# Altium PCB USB.PcbDoc
Units mm, origin at the board's own origin, x right, y up, seen from the top; angles counter-clockwise.
Board outline 51.5 x 20 mm, 4 copper layers (Top Layer, Layer 1, Layer 2, Bottom Layer), stack 0.603 mm thick; 65 components, 42 nets, 210 pads, 98 vias.
Unrouted connection lines stored in the file: 27.
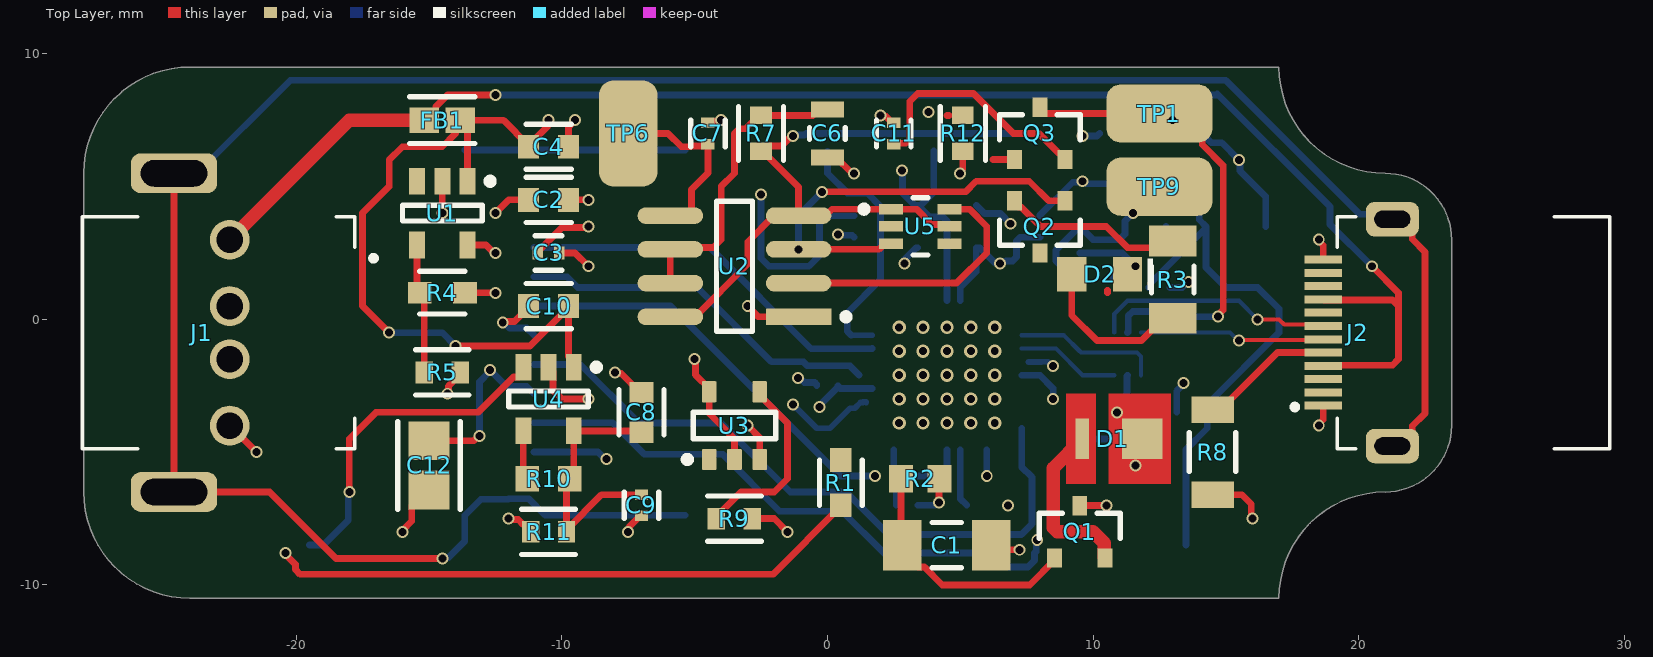
[diagram p0: Top Layer view]
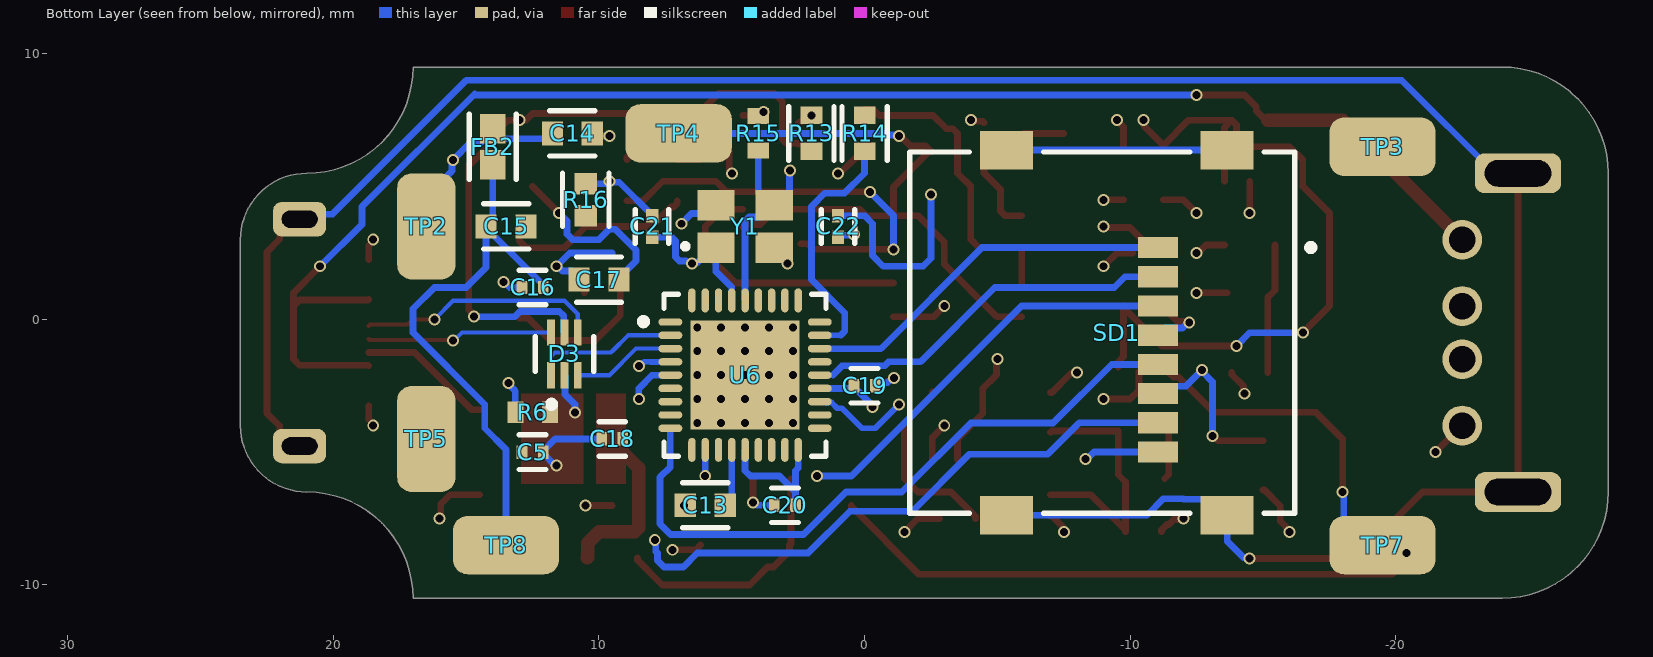
[diagram p1: Bottom Layer view, seen from below]
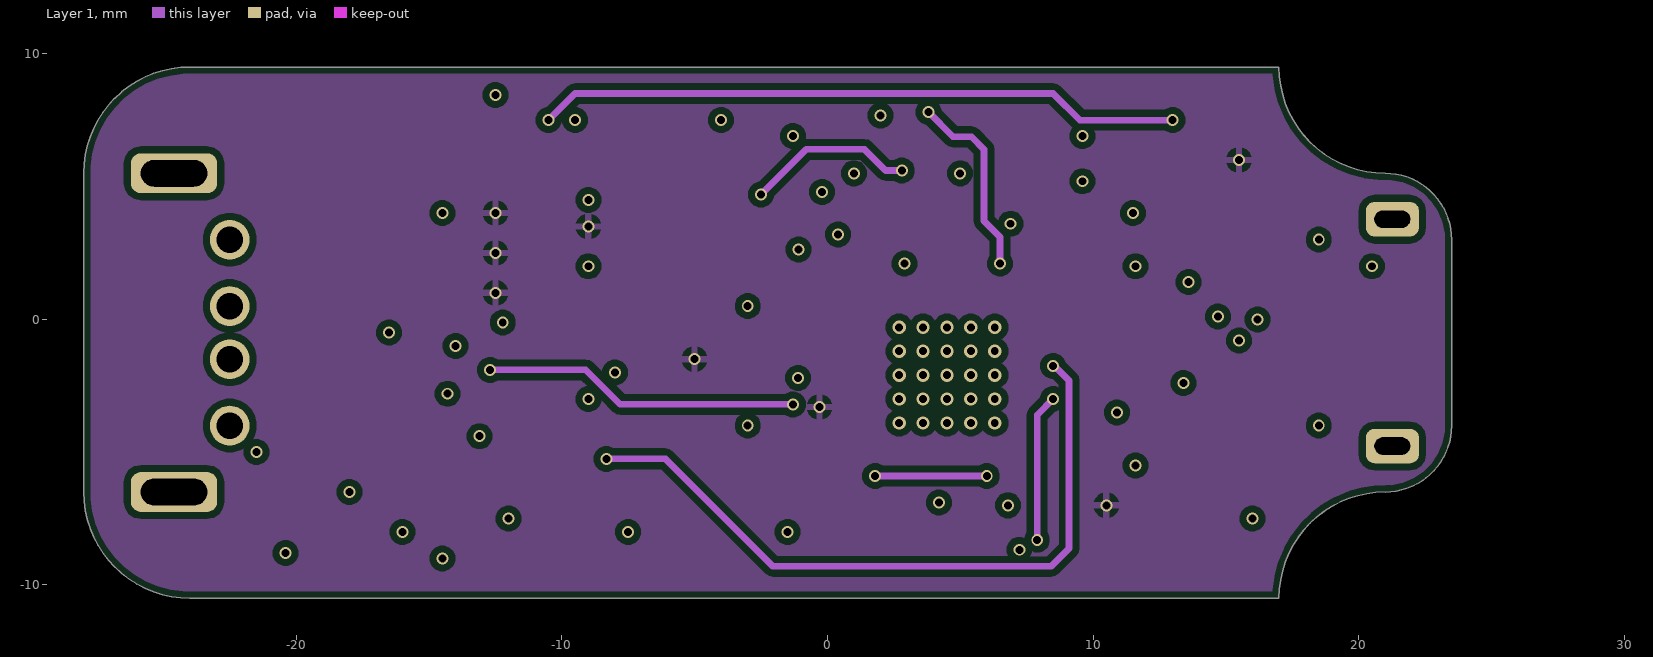
[diagram p2: Layer 1]
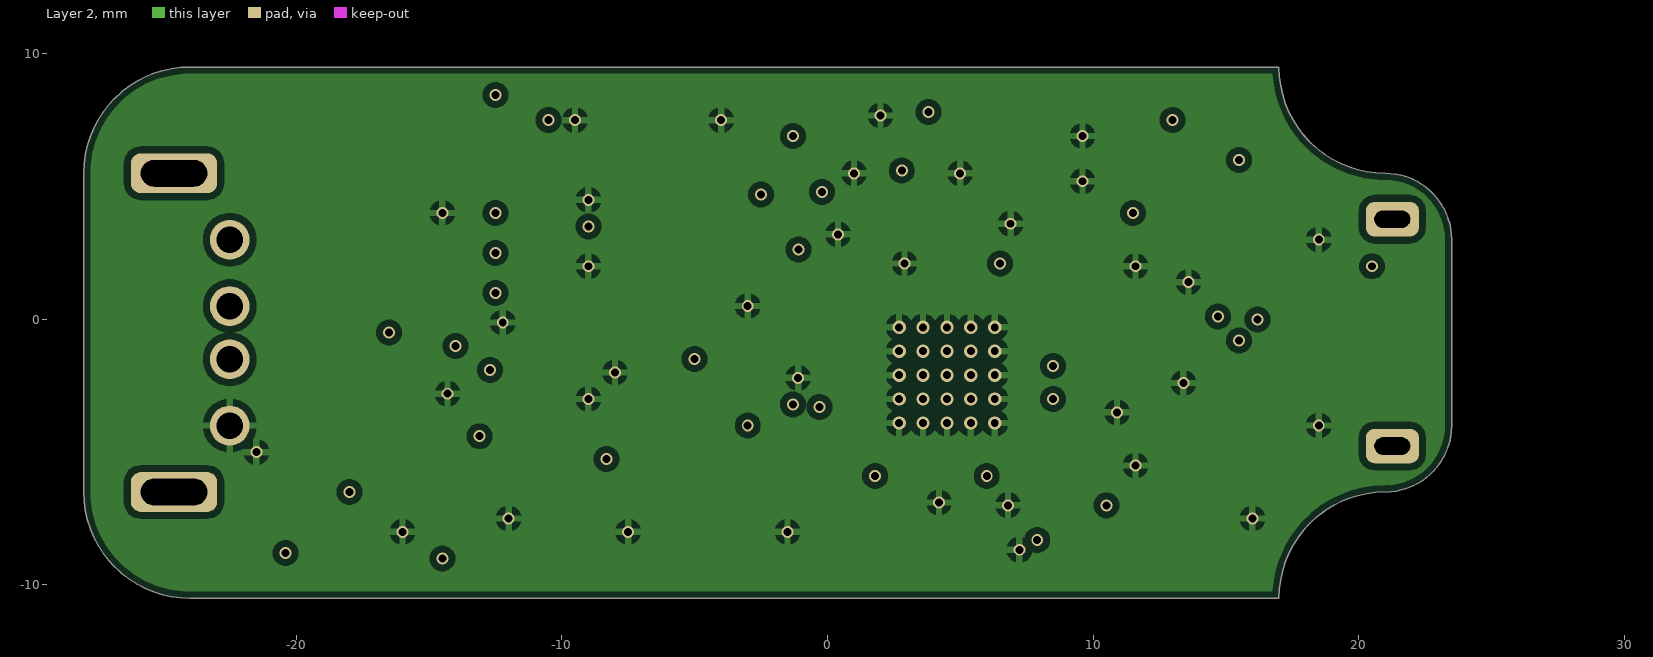
[diagram p3: Layer 2]
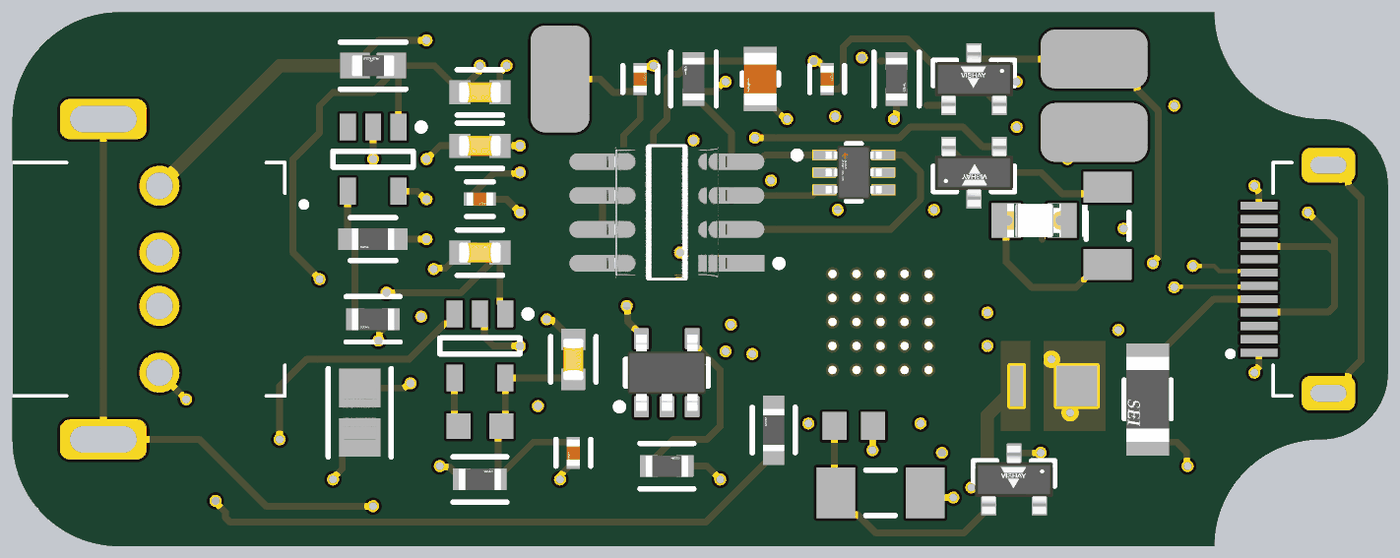
[diagram p4: 3D render of the assembled board from above, using the file's embedded part models]
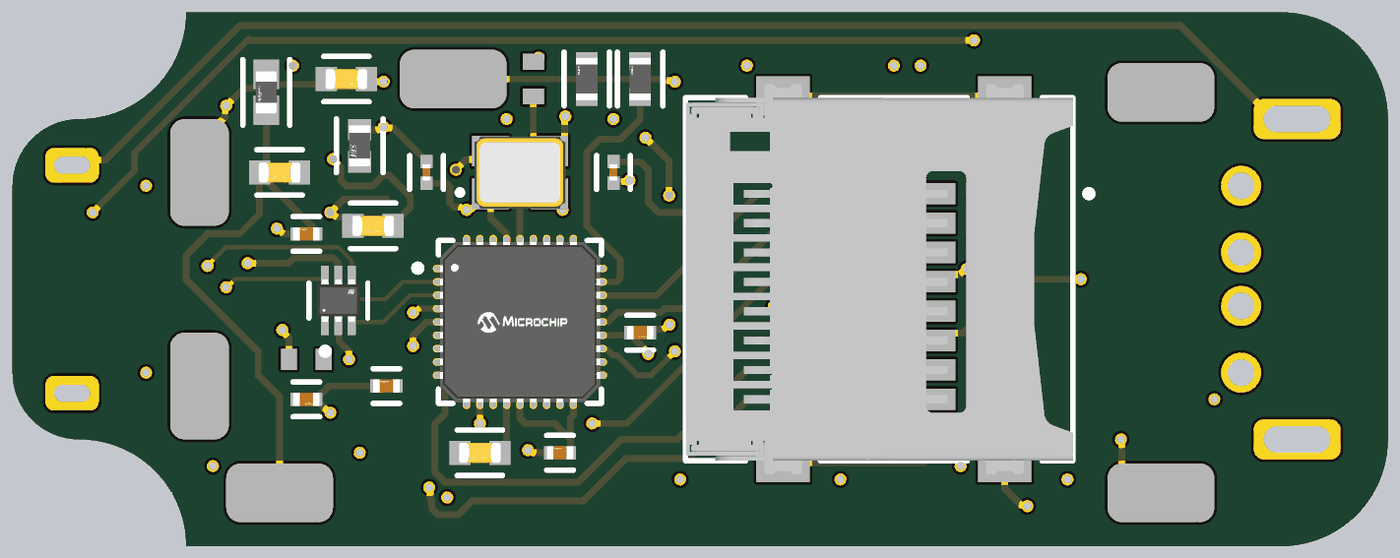
[diagram p5: 3D render of the assembled board from below, using the file's embedded part models]

## Layer stack, top to bottom
Top Solder: solder mask 0.0102, Solder Resist, Dk 3.5
Top Layer: signal copper 0.0356
Dielectric 2: prepreg 0.0711, PP-006, Dk 4.1
Layer 1: signal copper 0.035
Dielectric 1: dielectric 0.32, FR-4, Dk 4.8
Layer 2: signal copper 0.035
Dielectric 3: prepreg 0.0711, PP-006, Dk 4.1
Bottom Layer: signal copper 0.0356
Bottom Solder: solder mask 0.0102, Solder Resist, Dk 3.5

## Board outline
-24,-10.5 cw(c-24,-6.5) -28,-6.5 -28,5.5 cw(c-24,5.5) -24,9.5 17,9.5 ccw(c21,9.5) 21,5.5 cw(c21,3) 23.5,3 23.5,-4 cw(c21,-4) 21,-6.5 ccw(c21,-10.5) 17,-10.5

## Design rules (kind name [scope] priority, off if disabled: settings)
BoardOutlineClearance [All] p1: gap=0.254 ignorepadtopadclearanceinfootprint=FALSE except(0: Arc-SplitContinuation Track-SplitContinuation SMDPad-SplitContinuation THPad-SplitContinuation Via-SplitContinuation Fill-SplitContinuation Poly-SplitContinuation Region-SplitContinuation Text-SplitContinuation)
Clearance [All] p1: gap=0.254 ignorepadtopadclearanceinfootprint=FALSE except(0.15: Arc-SMDPad Track-SMDPad; 0.2: Arc-Arc Arc-Track Arc-Via Arc-Hole Track-Track Track-Via Track-Hole SMDPad-SMDPad; 0.3: Via-Via; 0.38: Arc-THPad Track-THPad)
DiffPairsRouting [All] p1: maxlimit=0.254 minlimit=0.17 mostfreqgap=0.254 toplayer_maxgap=0.23 toplayer_prefgap=0.2 toplayer_minwidth=0.13 toplayer_maxwidth=0.18 toplayer_prefwidth=0.155 midlayer1_mingap=0.254 midlayer1_minwidth=0.381 midlayer1_maxwidth=0.381 midlayer1_prefwidth=0.381 midlayer2_mingap=0.254 midlayer2_minwidth=0.381 midlayer2_maxwidth=0.381 midlayer2_prefwidth=0.381 bottomlayer_maxgap=0.23 bottomlayer_prefgap=0.2 bottomlayer_minwidth=0.13 bottomlayer_maxwidth=0.18 bottomlayer_prefwidth=0.155 maxuncoupledlength=12.7
PolygonConnect [All] p1: connectstyle=Relief reliefconductorwidth=0.254 reliefentries=4 polygonreliefangle="90 Angle" airgapwidth=0.254
RoutingVias [All] p1: holewidth=0.3 width=0.45 viastyle="Through Hole" minholewidth=0.3 minwidth=0.45 maxholewidth=0.3 maxwidth=0.45
SolderMaskExpansion [All] p1: expansion=0.102 istentingtop=FALSE
SupplyNets "Schematic Supply Nets_5" [InNet('VCC')] p1: voltage=0.000
SupplyNets "Schematic Supply Nets_4" [InNet('AVCC')] p2: voltage=0.000
SupplyNets "Schematic Supply Nets_3" [InNet('GND')] p3: voltage=0.000
SupplyNets "Schematic Supply Nets_2" [InNet('3V3')] p4: voltage=0.000
SupplyNets "Schematic Supply Nets" [InNet('4.5V')] p5: voltage=0.000
Width [All] p1: maxlimit=10 minlimit=0.2 preferedwidth=0.254 minimp=50.000000 maximp=50.000000 favimp=50.000000
29 further rules are at their usual default settings.

## Classes and differential pairs
component class U_MSC: C13 C14 C15 C16 C17 C18 C19 C20 C21 C22 FB2 R15 R16 TP8 TP9 U6 Y1
component class Master: C2 C3 C4 C5 C6 C7 C8 C9 C10 C11 C12 D3 FB1 J1 J2 Q3 R4 R5 R6 R7 R8 R9 R10 R11 R12 R13 R14 SD1 TP1 TP2 TP3 TP4 TP5 TP6 TP7 U1 U2 U3 U4 U5
component class Designator: C1 D1 D2 Q1 Q2 R1 R2 R3
differential pair D: +D_P -D_N
differential pair D_IN: +D_IN_P -D_IN_N

## Components (designator, comment, footprint, x,y, rotation, side; value= is the part's Value field where it differs from the comment)
C1 "GRM31CR60J107KEA8L" CAPC3216X19N 4.5,-8.5 r180 top value=100uF
C2 "CC0603KRX7R7BB105" FP-CC0603-DA-MFG -10.5,4.5 r0 top value="1 uF"
C3 "GRM155R71C104KA88J" FP-GRM155-0_05-MFG -10.5,2.5 r0 top
C4 "CC0603KRX7R7BB105" FP-CC0603-DA-MFG -10.5,6.5 r0 top value="1 uF"
C5 "GRM155R71C104KA88J" FP-GRM155-0_05-MFG 12.5,-5 r180 bottom
C6 "GRM21BR61C106KE15K" FP-GRM21B-0_1-MFG 0,7 r270 top
C7 "GRM155R71C104KA88J" FP-GRM155-0_05-MFG -4.5,7 r90 top
C8 "CC0603KRX7R7BB105" FP-CC0603-DA-MFG -7,-3.5 r90 top value="1 uF"
C9 "GRM155R71C104KA88J" FP-GRM155-0_05-MFG -7,-7 r270 top
C10 "CC0603KRX7R7BB105" FP-CC0603-DA-MFG -10.5,0.5 r180 top value="1 uF"
C11 "GRM155R71C104KA88J" FP-GRM155-0_05-MFG 2.5,7 r90 top
C12 "CL21A475KAQNNNE" FP-CL21-IPC_A -15,-5.5 r270 top
C13 "CC0603KRX7R7BB105" FP-CC0603-DA-MFG 6,-7 r180 bottom value="1 uF"
C14 "CC0603KRX7R7BB105" FP-CC0603-DA-MFG 11,7 r180 bottom value="1 uF"
C15 "CC0603KRX7R7BB105" FP-CC0603-DA-MFG 13.5,3.5 r180 bottom value="1 uF"
C16 "GRM155R71C104KA88J" FP-GRM155-0_05-MFG 12.5,1.2 r0 bottom
C17 "CC0603KRX7R7BB105" FP-CC0603-DA-MFG 10,1.5 r180 bottom value="1 uF"
C18 "GRM155R71C104KA88J" FP-GRM155-0_05-MFG 9.5,-4.5 r0 bottom
C19 "GRM155R71C104KA88J" FP-GRM155-0_05-MFG 0,-2.5 r180 bottom
C20 "GRM155R71C104KA88J" FP-GRM155-0_05-MFG 3,-7 r0 bottom
C21 "GJM0335C1E200FB01D" FP-GJM033-0_03-IPC_A 8,3.5 r90 bottom value=20pF
C22 "GJM0335C1E200FB01D" FP-GJM033-0_03-IPC_A 1,3.5 r270 bottom value=20pF
D1 "HL-AM-2835H489W-S1-08HL-HR3" HL-AM-2835H489W-S1-08HL-HR3-Footprint-1 10.6,-4.5 r0 top
D2 "150080RS75000" WL-SMCW_0805_150080xx75000 10.25,1.7 r180 top
D3 "USBLC6-2P6" FP-SOT-666-MFG 11.3,-1.3 r90 bottom
FB1 "BLM18PG600SN1D" FP-BLM18-0_15-t0_8-IPC_B -14.5,7.5 r180 top
FB2 "BLM18PG600SN1D" FP-BLM18-0_15-t0_8-IPC_B 14,6.5 r270 bottom
J1 "USB-AP-S-RA" BELFUSE_SS-52400-002#1 -24.6,-0.5 r270 top
J2 "GT-USB-8016B" BELFUSE_SS-52400-002#2 26,-0.5 r90 top
Q1 "SI2342DS-T1-GE3" FP-S-03946-MFG#1 9.5,-8 r90 top
Q2 "SI2342DS-T1-GE3" FP-S-03946-MFG#2 8,3.485 r270 top
Q3 "SI2342DS-T1-GE3" FP-S-03946-MFG#2 8,7 r90 top
R1 "RT0603BRD0732KL" FP-RT0603-0_55-MFG 0.5,-6.15 r90 top
R2 "2k" RESC1608X55X30ML15T15 3.5,-6 r180 top
R3 "62R 1% 1206(3216)" RESC1206(3216)_N 13,1.5 r270 top value=62.00
R4 "RT0603BRD0732KL" FP-RT0603-0_55-MFG -14.5,1 r180 top
R5 "RC0603FR-0710KL" FP-RC0603-0_55-IPC_C -14.5,-2 r180 top
R6 "RC0603JR-07330RL" RESC1608X55X25LL10T15 12.5,-3.5 r180 bottom
R7 "RC0603FR-0710KL" FP-RC0603-0_55-IPC_C -2.5,7 r90 top
R8 "RMCF1206JT56K0" FP-RMCF1206-MFG 14.5,-5 r270 top
R9 "RC0603FR-0710KL" FP-RC0603-0_55-IPC_C -3.5,-7.5 r0 top
R10 "RC0603FR-0744K2L" CAPC1608X06N -10.5,-6 r0 top value=44.2k
R11 "RC0603FR-0710KL" FP-RC0603-0_55-IPC_C -10.5,-8 r0 top
R12 "RC0603FR-0710KL" FP-RC0603-0_55-IPC_C 5.1,7 r270 top
R13 "RC0603FR-0710KL" FP-RC0603-0_55-IPC_C 2,7 r90 bottom
R14 "RC0603FR-0710KL" FP-RC0603-0_55-IPC_C 0,7 r90 bottom
R15 "1M" RESC1608X55X25LL10T15 4,7 r270 bottom
R16 "RMCF0603FT12K0" FP-RMCF0603-IPC_C 10.5,4.5 r270 bottom
SD1 "47219-2001" MOLX-47219-2001-8_V -9.5,-0.5 r270 bottom
TP1 "RH-5019" RH-5019-Footprint-1 12.5,7.75 r0 top
TP2 "RH-5019" RH-5019-Footprint-1 16.5,3.5 r270 bottom
TP3 "RH-5019" RH-5019-Footprint-1 -19.5,6.5 r180 bottom
TP4 "RH-5019" RH-5019-Footprint-1 7,7 r180 bottom
TP5 "RH-5019" RH-5019-Footprint-1 16.5,-4.5 r270 bottom
TP6 "RH-5019" RH-5019-Footprint-1 -7.5,7 r90 top
TP7 "RH-5019" RH-5019-Footprint-1 -19.5,-8.5 r180 bottom
TP8 "RH-5019" RH-5019-Footprint-1 13.5,-8.5 r0 bottom
TP9 "RH-5019" RH-5019-Footprint-1 12.5,5 r0 top
U1 "RS3236-ADJ8YF5" SOT95P245X110-5N -14.5,4 r270 top
U2 "NE555DR" FP-D0008A-IPC_A -3.5,2 r180 top
U3 "SN74AHC1G14DBVR" DBV0005A_L -3.5,-4 r90 top
U4 "RS3236-ADJ8YF5" SOT95P245X110-5N -10.5,-3 r270 top
U5 "SN74LVC1G97DCKR" FP-DCK0006A-MFG 3.5,3.5 r0 top
U6 "USB2240-AEZG-06" FP-36QFN-4106-6x6B-MFG 4.5,-2.1 r180 bottom value=100nF
Y1 "830035266" WE-XTAL_CFPX-180 4.5,3.5 r180 bottom

## Footprints (in the part's own frame and the unit in brackets; to place one, negate y for a bottom-side part, rotate by r counter-clockwise, add the part's x,y. Pads: shape width x height; smd on the part's side, far side on the other; paste and mask are expansions set on the pad)
BELFUSE_SS-52400-002#1 [mm]
  round 1.5 hole 1: 1(-3.5,2.1) 2(1,2.1) 3(-1,2.1) 4(3.5,2.1)
  rrect50% 1.5x3.25 hole 1 slot 2.5 at 90 deg: 5(-6,0) 6(6,0)
  silkscreen extent -4.37,-3.45 4.37,7.61
BELFUSE_SS-52400-002#2 [mm]
  rect 0.3x1.4 smd: A1(-2.75,7.33) A2(-2.25,7.33) A3(-1.75,7.33) A4(-1.25,7.33) A5(-0.75,7.33) A6(-0.25,7.33) A7(0.25,7.33) A8(0.75,7.33) A9(1.25,7.33) A10(1.75,7.33) A11(2.25,7.33) A12(2.75,7.33)
  rrect50% 1.3x2 hole 0.65 slot 1.35 at 90 deg: S1(-4.27,4.73) S2(4.27,4.73)
  silkscreen extent -4.37,-3.45 4.37,8.5
CAPC1608X06N [mm] "Chip Capacitor, 2-Leads, Body 1.60x0.80mm, IPC Medium Density"
  rect 0.9x0.95 smd: 1(-0.8,0) 2(0.8,0)
  body extent -0.85,-0.45 0.85,0.45, height 0.55
CAPC3216X19N [mm] "Chip Capacitor, 2-Leads, Body 3.20x1.60mm, IPC Medium Density"
  rect 1.45x1.9 smd: 1(-1.675,0) 2(1.675,0)
  silkscreen extent -0.55,-0.85 0.55,0.85, body extent -1.45,-0.95 1.45,0.95, height 1.9
DBV0005A_L [mm] "SOT23, 5-Leads, Body 3.05x1.75mm, Pitch 0.95mm, IPC High Density"
  rrect18% 0.8x0.55 smd: 1(-1.275,0.95) 2(-1.275,0) 3(-1.275,-0.95) 4(1.275,-0.95) 5(1.275,0.95)
  silkscreen extent -1.4,-1.55 0.5,1.9, body extent -1.42,-1.46 1.42,1.46, height 1.08
FP-36QFN-4106-6x6B-MFG [mm]
  rrect100% 0.9x0.28 smd paste-1000 mask+0: 1(-2.812,2) 2(-2.812,1.5) 3(-2.812,1) 4(-2.812,0.5) 5(-2.812,0) 6(-2.812,-0.5) 7(-2.812,-1) 8(-2.812,-1.5) 9(-2.812,-2) 19(2.812,-2) 20(2.812,-1.5) 21(2.812,-1) 22(2.812,-0.5) 23(2.812,0) 24(2.812,0.5) 25(2.812,1) 26(2.812,1.5) 27(2.812,2)
  rrect100% 0.28x0.9 smd paste-1000 mask+0: 10(-2,-2.812) 11(-1.5,-2.812) 12(-1,-2.812) 13(-0.5,-2.812) 14(0,-2.812) 15(0.5,-2.812) 16(1,-2.812) 17(1.5,-2.812) 18(2,-2.812) 28(2,2.812) 29(1.5,2.812) 30(1,2.812) 31(0.5,2.812) 32(0,2.812) 33(-0.5,2.812) 34(-1,2.812) 35(-1.5,2.812) 36(-2,2.812)
  rect 4.1x4.1 smd paste-1000 mask+0: 37(0,0)
  silkscreen extent -3.95,-3.05 3.05,3.05, body extent -3,-3 3,3, height 0.9
FP-BLM18-0_15-t0_8-IPC_B [mm]
  rect 1.106x0.958 smd paste+0 mask+0: 1(-0.676,0) 2(0.676,0)
  silkscreen extent -1.23,-0.88 1.23,0.88, body extent -1.48,-0.73 1.48,0.73, height 0.25
FP-CC0603-DA-MFG [mm]
  rect 0.8x0.9 smd paste+0 mask+0: 1(-0.75,0) 2(0.75,0)
  silkscreen extent -0.85,-0.85 0.85,0.85, body extent -1.35,-0.75 1.35,0.75, height 0.25
FP-CL21-IPC_A [mm]
  rect 1.455x1.556 smd paste+0 mask+0: 1(-0.926,0) 2(0.926,0)
  silkscreen extent -1.65,-1.18 1.65,1.18, body extent -2.15,-1.28 2.15,1.28, height 0.25
FP-D0008A-IPC_A [mm]
  rect 2.469x0.622 smd paste+0 mask+0: 1(-2.414,1.905)
  rrect100% 2.469x0.622 smd paste+0 mask+0: 2(-2.414,0.635) 3(-2.414,-0.635) 4(-2.414,-1.905) 5(2.414,-1.905) 6(2.414,-0.635) 7(2.414,0.635) 8(2.414,1.905)
  silkscreen extent -4.32,-2.45 0.68,2.45, body extent -4.15,-2.95 4.15,2.95, height 0.25
FP-DCK0006A-MFG [mm]
  rect 0.9x0.4 smd paste-1000 mask+0: 1(-1.1,0.65) 2(-1.1,0) 3(-1.1,-0.65) 4(1.1,-0.65) 5(1.1,0) 6(1.1,0.65)
  silkscreen extent -2.25,-1.07 0.28,1.07, body extent -1.65,-1.33 1.65,1.33, height 0.25
FP-GJM033-0_03-IPC_A [mm]
  rect 0.504x0.463 smd paste+0 mask+0: 1(-0.405,0) 2(0.404,0)
  silkscreen extent -0.63,-0.63 0.63,0.63, body extent -0.3,-0.15 0.3,0.15, height 0.33
FP-GRM21B-0_1-MFG [mm]
  rect 0.6x1.25 smd paste+0 mask+0: 1(-0.9,0) 2(0.9,0)
  silkscreen extent -0.23,-0.67 0.23,0.67, body extent -1.3,-0.77 1.3,0.77, height 0.25
FP-GRM155-0_05-MFG [mm]
  rect 0.4x0.5 smd paste+0 mask+0: 1(-0.4,0) 2(0.4,0)
  silkscreen extent -0.5,-0.65 0.5,0.65, body extent -0.7,-0.38 0.7,0.38, height 0.25
FP-RC0603-0_55-IPC_C [mm]
  rect 0.659x0.812 smd paste+0 mask+0: 1(-0.677,0) 2(0.677,0)
  silkscreen extent -1.01,-0.85 1.01,0.85, body extent -1.11,-0.55 1.11,0.55, height 0.25
FP-RMCF0603-IPC_C [mm]
  rect 0.806x0.858 smd paste+0 mask+0: 1(-0.601,0) 2(0.601,0)
  silkscreen extent -1,-0.87 1,0.87, body extent -0.77,-0.4 0.77,0.4, height 0.55
FP-RMCF1206-MFG [mm]
  rect 1x1.6 smd paste+0 mask+0: 1(-1.6,0) 2(1.6,0)
  silkscreen extent -0.72,-0.87 0.72,0.87, body extent -2.2,-0.97 2.2,0.97, height 0.25
FP-RT0603-0_55-MFG [mm]
  rect 0.9x0.8 smd paste+0 mask+0: 1(-0.85,0) 2(0.85,0)
  silkscreen extent -0.85,-0.81 0.86,0.8, body extent -1.4,-0.55 1.4,0.55, height 0.25
FP-S-03946-MFG#1 [mm]
  rect 0.724x0.559 smd paste+0 mask+0: 1(-0.984,0.95) 2(-0.984,-0.95) tga(0.984,0)
  silkscreen extent -0.25,-1.52 0.7,1.52, body extent -1.45,-1.62 1.45,1.62, height 0.25
FP-S-03946-MFG#2 [mm]
  rect 0.724x0.559 smd paste+0 mask+0: 1(-0.984,0.95) 2(-0.984,-0.95) 3(0.984,0)
  silkscreen extent -0.25,-1.52 0.7,1.52, body extent -1.45,-1.62 1.45,1.62, height 0.25
FP-SOT-666-MFG [mm]
  rect 0.99x0.3 smd paste+0 mask+0: 1(-0.805,0.5) 2(-0.805,0) 3(-0.805,-0.5) 4(0.805,-0.5) 5(0.805,0) 6(0.805,0.5)
  silkscreen extent -2.02,-1.1 0.65,1.1, body extent -0.8,-0.8 0.8,0.8, height 0.6
HL-AM-2835H489W-S1-08HL-HR3-Footprint-1 [mm]
  rect 1.524x1.524 smd: 1(1.25,0)
  rect 0.5x1.524 smd: 2(-1,0)
  Top Layer region: -1.6,1.69 -1.6,-1.69 -0.5,-1.69 -0.5,1.69
  Top Layer region: 0,1.69 0,-1.69 2.33,-1.69 2.33,1.69
MOLX-47219-2001-8_V [mm] "CONN, 8-Leads, Body 14.5x13.6mm, Pitch 1.1mm"
  rect 0.8x1.5 smd: 1(-3.205,1.55) 2(-2.105,1.55) 3(-1.005,1.55) 4(0.095,1.55) 5(1.195,1.55) 6(2.295,1.55) 7(3.395,1.55) 8(4.495,1.55)
  rect 1.45x2 smd: 9(6.875,4.15) 10(6.875,-4.15) 11(-6.875,-4.15) 12(-6.875,4.15)
  silkscreen extent -6.8,-7.8 6.8,7.42, body extent -7.3,-7.79 7.3,6.71, height 1.91
RESC1206(3216)_N [mm] "Chip Resistor, Body 3.2x1.6mm, IPC Medium Density"
  rect 1.15x1.8 smd: 1(-1.45,0) 2(1.45,0)
  silkscreen extent -0.5,-0.8 0.5,0.8, body extent -1.67,-0.87 1.67,0.87, height 0.75
RESC1608X55X25LL10T15 [mm] "Chip Resistor, 2-Leads, Body 1.60x0.80mm, IPC High Density"
  rect 0.6x0.8 smd: 1(-0.65,0) 2(0.65,0)
  body extent -0.85,-0.45 0.85,0.45, height 0.55
RESC1608X55X30ML15T15 [mm] "Chip Resistor, 2-Leads, Body 1.60x0.80mm, IPC Low Density"
  rect 0.9x1.05 smd: 1(-0.725,0) 2(0.725,0)
  body extent -0.87,-0.48 0.87,0.48, height 0.55
RH-5019-Footprint-1 [mm]
  rrect50% 4x2.2 smd: 1(0,0)
SOT95P245X110-5N [mm] "SOT23, 5-Leads, Body 2.90x2.45mm, Pitch 0.95mm, IPC Medium Density"
  rect 1x0.6 smd: 1(-1.2,0.95) 2(-1.2,0) 3(-1.2,-0.95) 4(1.2,-0.95) 5(1.2,0.95)
  silkscreen extent -1.32,-1.5 0.3,1.93, body extent -0.7,-1.5 0.7,1.5, height 1.1
WE-XTAL_CFPX-180 [mm] "Quartz Crystal, size CFPX-180, body 3.4x2.7mm"
  rect 1.4x1.15 smd: 1(-1.1,-0.8) 2(1.1,-0.8) 3(1.1,0.8) 4(-1.1,0.8)
  silkscreen extent -2.35,-0.85 -2.15,-0.65, body extent -1.7,-1.35 1.7,1.35, height 0.65
WL-SMCW_0805_150080xx75000 [mm] "SMD Mono-color Chip LED, body 2.0x1.25mm"
  rect 1.1x1.3 smd: 1(-1.05,0) 2(1.05,0)
  silkscreen extent -2,-0.6 -1.8,0.6, body extent -1,-0.63 1,0.62, height 0.7

## Part data
C1: library part CMP-001-00083-1, "6.3V 100uF X5R ¡À10% 1206 Multilayer Ceramic Capacitors MLCC - SMD/SMT ROHS"
C2 C4 C8 C10 C13 C14 C15 C17: library part CMP-03422-000924-1, "CAP CER 1UF 16V X7R 0603", Capacitance="1 uF", Manufacturer=YAGEO, Package=CC0603-DA, Temperature="-55°C to +125°C", Temperature Characteristic=X7R, Temperature Coefficient=15%, Temperature Range High=+125°C, Temperature Range Low=-55°C, Tolerance=0.1, Voltage="16 V", Automotive=No, Category=Cap, ComponentLink2Description=Datasheet, ComponentLink2URL=http://www.yageo.com/documents/recent/UPY-GPHC_X7R_6.3V-to-50V_18.pdf, Device Class L1="Passive Components", Device Class L2=Capacitors, Device Class L3="Ceramic Capacitors", Digikey Description="CAP CER 1UF 16V X7R 0603", Footprint Url=http://www.yageo.com/exep/pages/download/literatures/UPY-C_GEN_24.pdf, Height=0.9mm, Lead Free=Yes, Manufacturer Part Number=CC0603KRX7R7BB105, Material=Ceramic, Mouser Description="Multilayer Ceramic Capacitor, CC Series, 1 - F, - 10%, X7R, 16 V, 0603 [1608 Metric]", Octopart=https://octopart.com/cc0603krx7r7bb105-yageo-42271928, RoHS=TRUE, Voltage Rating="16 V"
C3 C5 C7 C9 C11 C16 C18 C19 C20: library part CMP-2008-03928-2, Capacitance=100nF, Case Code (Imperial)=0402, Case Code (Metric)=1005, Dielectric=X7R, Manufacturer Lifecycle Status=NRND, Max Operating Temperature=125°C, Min Operating Temperature=-55°C, Tolerance=10%, Voltage=16V, Case/Package=0402, Depth=500µm, Height=550µm, Lead Free="Lead Free", Length=1mm, Material=Ceramic, Mount="Surface Mount", NexarPartId=9223238, Number of Pins=2, Packaging="Cut Tape", Radiation Hardening=No, REACH SVHC="No SVHC", RoHS=Compliant, Schedule B="8532240020, 8532240020", Termination=SMD/SMT, Thickness=500µm, Voltage Rating=16V, Voltage Rating (DC)=16V, Width=500µm
C6: library part CMP-2007-03534-2, "Chip Multilayer Ceramic Capacitors for General Purpose, 0805, 10uF, X5R, 15%, 10%, 16V", Capacitance=10uF, Case Code (Imperial)=0805, Case Code (Metric)=2012, Dielectric=X5R, Max Operating Temperature=85°C, Min Operating Temperature=-55°C, Package Quantity=10000, Tolerance=10%, Voltage=16V, Case/Package=0805, Depth=1.25mm, Height=1.25mm, Length=2mm, Mount="Surface Mount", Packaging="Tape and Reel", Radiation Hardening=No, REACH SVHC="No SVHC", Termination=SMD/SMT, Thickness=0.053inch, Voltage Rating=16V, Voltage Rating (DC)=16V, Width=0.049inch
C12: library part CMP-13271-002624-1, "CL21 Series 0805 4.7uF 25V ±10% Tolerance X5R Multilayer Ceramic Chip Capacitor", Capacitance=4.7uF, Case Code (Imperial)=0805, Case Code (Metric)=2012, Dielectric=X5R, Max Operating Temperature=85°C, Min Operating Temperature=-55°C, Package Quantity=1, Tolerance=10%, Voltage Rating=25V, Case/Package=0805, Depth=1.25mm, Height=1.25mm, Lead Free="Lead Free", Length=2mm, Mount="Surface Mount", Packaging="Tape and Reel", Radiation Hardening=No, Thickness=0.055inch, Voltage Rating (DC)=25V, Width=0.049inch
C21 C22: library part CMP-06035-050874-1, "Ceramic Capacitor 20pF ±1% 25V C0G 0201 (0603 Metric)"
D1: library part CMP-007-00036-1
D2: library part CMP-1426-00011-3, "LED Uni-Color Red 630nm 2-Pin Chip 0805(2012Metric) T/R", Case Code (Imperial)=0805, Case Code (Metric)=2012, Color=Red, Forward Current=100mA, Forward Voltage=2V, Max Junction Temperature (Tj)=95°C, Max Operating Temperature=85°C, Max Reverse Voltage (DC)=5V, Min Operating Temperature=-40°C, Power Dissipation=72mW, Test Current=20mA, Case/Package=0805, Dominant Wavelength=625nm, Height=700µm, Length=2mm, Lens Style="Clear, Rectangular", Luminous Intensity=150mcd, Mount="Surface Mount", Packaging="Tape and Reel", Peak Wavelength=630nm, REACH SVHC=Unknown, RoHS=Compliant, Viewing Angle=140°, Wavelength=625nm, Width=1.25mm
D3: library part CMP-12225-000058-1, "TVS DIODE 5.25V 17V SOT666", Breakdown Voltage=6V, Capacitance=3.5pF, Case/Package=SOT-666, Clamping Voltage=17V, Leakage Current=150nA, Max Operating Temperature=125°C, Min Operating Temperature=-40°C, Operating Supply Voltage=5V, Package Quantity=1, Peak Pulse Current=5A, Power Line Protection=Yes, Test Current=1mA, Contact Plating=Tin, Depth=1.3mm, Direction=Unidirectional, Element Configuration=Dual, ESD Protection=Yes, Height=0.6mm, Lead Free="Lead Free", Length=1.7mm, Max Breakdown Voltage=6V, Max Reverse Leakage Current=150nA, Min Breakdown Voltage=6V, Mount="Surface Mount", Number of Bidirectional Channels=2, Number of Channels=2, Number of Elements=1, Number of Pins=6, Packaging="Tape and Reel", Polarity=Unidirectional, Radiation Hardening=No, REACH SVHC="No SVHC", Reverse Breakdown Voltage=6V, Reverse Standoff Voltage=5V, Termination=SMD/SMT, Width=1.3mm, Working Voltage=5V
FB1 FB2: library part CMP-0686-00575-3, "Chip Ferrite Bead, 0603, 60Ω @ 100MHz, 0.1Ω, , 1A", Case Code (Imperial)=0603, Case Code (Metric)=1608, Current Rating=500mA, DC Resistance (DCR)=100mR, ESR (Equivalent Series Resistance)=60R, Frequency=100MHz, Max Operating Temperature=125°C, Min Operating Temperature=-55°C, Package Quantity=1, Tolerance=25%, Case/Package=0603, Core Material=Ferrite, Depth=0.8mm, Height=0.8mm, Impedance=60R, Lead Free="Lead Free", Length=1.6mm, Material=Steel, Max Current Rating=500mA, Max DC Current=500mA, Number of Circuits=1, Number of Lines=1, Number of Pins=2, Packaging="Tape and Reel", REACH SVHC="No SVHC", Resistance=100mR, RoHS Compliant=Yes, Shielding=Unshielded, Termination=SMD/SMT, Test Frequency=100MHz, Width=0.8mm
J1: library part CMP-002-00072-3, "USB Type A Plug Single R/A PCB"
J2: library part CMP-002-00071-2, "USB C 2.0 Plug"
Q1 Q2 Q3: library part CMP-02550-000018-1, "MOSFET N-CH 8V 6A SOT-23", Continuous Drain Current=6A, Drain To Source Breakdown Voltage=8V, Drain To Source Resistance=0.014Ω, Gate To Source Voltage=5V, Input Capacitace At Vds="1070pF @ 4V", Manufacturer=Vishay, Max Forward Diode Voltage=1.2V, Max Junction Temp=+150°C, Package=S-03946, Power Dissipation=1.3W, Pulse Drain Current=30A, Temperature="-55°C to +150°C", Temperature Range Low=-55°C, Typ Forward Diode Voltage=0.82V, Automotive=No, Category=Trans, ComponentLink2Description=Datasheet, ComponentLink2URL=https://www.vishay.com/docs/63302/si2342ds.pdf, Depletion Mode=False, Device Class L1="Discrete Semiconductors", Device Class L2=Transistors, Device Class L3=MOSFETs, Digikey Description="MOSFET N-CH 8V 6A SOT-23", Drain To Source Voltage=8V, Gate Charge At Vgs="10.5nC @ 4.5V", Height=1.12mm, Ipc Land Pattern Name=SOT95P237X100-3, Lead Free=Yes, Manufacturer Part Number=SI2342DS-T1-GE3, Mouser Description="MOSFET 8V 6A 2.5", Number of Channels=1, Number Of N Channels=1, Octopart=https://octopart.com/si2342ds-t1-ge3-vishay-45050957, Reverse Recovery Charge=17nC, Reverse Recovery Time=40ns, RoHS=TRUE, Rthja Max=75°C/W, Standoff Height=0.01mm, Temperature Range High=+150°C, Threshold Vgs Max=0.8V, Threshold Vgs Min=0.35V, Transconductance=75S, Turn Off Delay Time=65ns, Turn On Delay Time=6ns
R1 R4: library part CMP-00621-34935746-1, "RT0603BRD0732KL High Precision-High Stability Chip Resistor Thin Film 0603 32kOhm 0.1% Paper T/R", Case/Package=0603, Max Operating Temperature=155°C, Max Power Dissipation=100mW, Min Operating Temperature=-55°C, Resistance=32kΩ, Temperature Coefficient=25ppm/°C, Tolerance=0.1%, Composition="Thin Film", Features="Moisture Resistant", Height=558.8µm, Length=1.6002mm, NexarPartId=34935746, Number of Terminations=2, Packaging="Tape & Reel", RoHS=Compliant, Width=787.4µm
R2: library part CMP-2000-00317-1, Manufacturer=Panasonic, Part Number=ERJ-3EKF2001V
R3: library part CMP-1014-00373-1, "62R 0.25W 1% 1206 (3216 Metric)  SMD", Case-EIA=1206, Case-Metric=3216, Power="0.25 W", Tolerance="1 %", Technology=SMT
R5 R7 R9 R11 R12 R13 R14: library part CMP-2100-03664-2, "RES 10K OHM 1% 1/10W 0603", Case Code (Imperial)=0603, Case Code (Metric)=1608, Max Operating Temperature=155°C, Max Power Dissipation=100mW, Min Operating Temperature=-55°C, Resistance=10k, Resistance Tolerance=1%, Resistor Type="Thick Film", Temperature Coefficient=100ppm/°C, Voltage Rating=75V, Voltage Rating (DC)=50V, Case/Package=0603, Construction=Rectangular, Depth=0.8mm, Features="Moisture Resistant", Height=0.45mm, Lead Free="Lead Free", Lead Pitch=0.3mm, Length=1.6mm, Military Standard=Not, Number of Pins=2, Number of Terminations=2, Packaging="Tape and Reel", Power Rating=100mW, RoHS Compliant=Yes, Series=RC, Size Code=0603, Termination=SMD/SMT, Tolerance=1%, Weight=7.1E-05oz, Width=0.8mm
R6: library part CMP-2000-06958-1, "Chip Resistor, 330 Ohm, +/- 5%, 50 V, -55 to 155 degC, 0603 (1608 Metric), -40 to 155 degC, RoHS, Tape and Reel", Manufacturer=Yageo, Package Description="2-Pin Surface Mount Device, Body 1.6 x 0.8 mm", Package Reference=0603, Power Rating=100mW, Resistance=330, Resistance Tolerance=±5%, Resistor Case Style=0603[1608Metric], Resistor Element Type=ThickFilm, Temperature Coefficient=±100ppm/°C, Voltage Rating=50V, Automotive Qualification Standard=-, Datasheet URL=http://www.yageo.com/documents/recent/PYu-RC_Group_51_RoHS_L_7.pdf, Datasheet Version="Rev. 7, 05/2017", Manufacturer URL=http://www.yageo.com/, Mounting Technology=SurfaceMount, MSL=MSL1-Unlimited, Packaging=CutTape, Product Range=RCSeries, SVHC=ToBeAdvised
R8: library part CMP-26527-003341-1, "56kΩ ±5% 0.25W 1206 Thick Film Chip Resistor AEC-Q200 compliant", Case Code (Imperial)=1206, Case Code (Metric)=3216, Max Operating Temperature=155°C, Max Power Dissipation=250mW, Min Operating Temperature=-55°C, Resistance=56k, Resistor Type="Thick Film", Temperature Coefficient=200ppm/°C, Tolerance=5%, Case/Package=1206, Construction=Rectangular, Contact Plating=Tin, Depth=1.6mm, Features="Automotive AEC-Q200", Height=0.028inch, Lead Free="Lead Free", Length=0.126inch, Military Standard=Not, Mount="Surface Mount", Number of Terminations=2, Packaging="Tape and Reel", Power Rating=250mW, Radiation Hardening=No, RoHS Compliant=Yes, Series=RMCF, Size Code=1206, Width=0.063inch
R10: library part CMP-009-00177-1, "Fixed Resistor, Metal Glaze/thick Film, 0.1W, 44200ohm, 75V, 1% +/-Tol, 100ppm/Cel, Surface Mount, 0603", Case/Package=0603, Max Operating Temperature=155°C, Min Operating Temperature=-55°C, Power=100mW, Tolerance=1%, Mounting Technology="Surface Mount", Pins=2, RoHS Compliant=Yes
R15: library part CMP-1659-00056-1, "Chip Resistor, 1 MOhm, +/- 1%, 100 mW, -55 to 155 degC, 0603 (1608 Metric), RoHS, Tape and Reel", Capacitance="1 mF", Case\Package=Radial, Max Operating Temperature="85 degC", Min Operating Temperature="-40 degC", Package Quantity=200, Tolerance=20%, Voltage Rating="25 V", ComponentLink1Description="Manufacturer URL", ComponentLink1URL=http://www.yageo.com/, ComponentLink2Description=Datasheet, ComponentLink2URL=http://www.yageo.com/documents/recent/PYu-RC_Group_51_RoHS_L_04.pdf, DatasheetVersion="Rev. 4, 02/2016", Diameter="10 mm", Height="20 mm", Lead Pitch="5 mm", Length="20 mm", Mount="Through Hole", PackageDescription="2-Pin Surface Mount Device, Body 1.6 x 0.8 mm", PackageReference=0603, Packaging=Bulk, Radiation Hardening=No, REACH SVHC="No SVHC", RoHSCompliant=true, Voltage Rating (DC)="25 V", Width="0 inch"
R16: library part CMP-26527-001326-1, "12kΩ ±1% 0.1W 0603 Thick Film Chip Resistor AEC-Q200 compliant", Case Code (Imperial)=0603, Case Code (Metric)=1608, Max Operating Temperature=155°C, Max Power Dissipation=100mW, Min Operating Temperature=-55°C, Resistance=12k, Resistor Type="Thick Film", Temperature Coefficient=100ppm/°C, Tolerance=1%, Case/Package=0603, Contact Plating=Tin, Features="Automotive AEC-Q200", Height=0.022inch, Lead Free="Lead Free", Length=0.061inch, Mount="Surface Mount", Number of Terminations=2, Packaging="Tape and Reel", Power Rating=100mW, Radiation Hardening=No, RoHS Compliant=Yes, Series=RMCF, Size Code=0603, Width=0.031inch
SD1: library part CMP-2000-05245-1, "MicroSD Card Connector, Hinge Type, -40 to 85 degC, 8-Pin SMD, RoHS, Tape and Reel", Current Rating=500mA, Manufacturer=Molex, Voltage Rating=100VDC, Brand=Molex, Card Type=microSD, Contact Material=CopperAlloy, Datasheet URL=http://www.molex.com/pdm_docs/sd/472192001_sd.pdf, Datasheet Version="Rev. F, 06/2009", Factory Pack Quantity=2400, Housing Material=Thermoplastic, Insertion - Extraction Style=Hinged, Manufacturer URL=http://www.molex.com/, Mounting Style=SMD/SMT, Number of Contacts=8, Packaging=Reel, Pitch=1.09mm, Product=CardConnectors, Product Category=MemoryCardConnectors, RoHS=Details, Series=47219, Termination Style=SMD
TP1 TP2 TP3 TP4 TP5 TP6 TP7 TP8 TP9: library part CMP-00030-00001-2, "PC Test Point"
U1 U4: library part CMP-019-00049-1, "IC Reg Lin Pos Adj 500MA SOT23-5"
U2: library part CMP-1685-00007-2, "IC OSC SGL TIMER 100KHZ 8-SOIC", Case/Package=SOIC, Frequency=100kHz, High Level Output Current=-200mA, Low Level Output Current=200mA, Max Operating Temperature=70°C, Max Supply Voltage=16V, Min Operating Temperature=0°C, Min Supply Voltage=4.5V, Operating Supply Current=10mA, Package Quantity=2500, Quiescent Current=15mA, Contact Plating=Gold, Height=1.58mm, Lead Free="Lead Free", Length=4.9mm, Mount="Surface Mount", Number of Pins=8, Number of Timers/Counters=1, Packaging="Tape and Reel", Radiation Hardening=No, REACH SVHC="No SVHC", Weight=0.002561oz, Width=3.91mm
U3: library part CMP-2000-07131-1, "Single Schmitt-Trigger Inverter Gate, 10.6 ns max, 2 to 5.5 V, -40 to 125 degC, 5-Pin SOT23 (DBV), Green (RoHS & no Sb/Br), Tape and Reel", Logic Case Style=SOT-23, Manufacturer="Texas Instruments", Operating Temperature Max=85°C, Operating Temperature Min=-40°C, Operating Temperature Range=-40°Cto+85°C, Output Current=8mA, Package Description="5-Pin Small Outline Transistor, Body 2.9 x 1.6 mm, Pitch 0.95 mm", Package Reference=DBV0005A, Supply Voltage=5.5V, Supply Voltage Min=2V, Supply Voltage Range=2Vto5.5V, Base Number=74, Datasheet URL=http://www.ti.com/lit/ds/symlink/sn74ahc1g14.pdf, Datasheet Version="Rev. Q, 09/2015", IC Generic Number=74AHC1G14, Logic Function Number=741G14, Logic IC Base Number=74114, Logic IC Family=AHC, Logic IC Function=SingleInverterwithSchmittTrigger, Logic Type=Inverter, Manufacturer URL=http://www.ti.com/, Mounting Technology=SurfaceMount, No. of Gates=1, No. of Inputs=1, No. of Pins=5, Output Current Max=8mA, Package / Case=SOT-23, Package URL=http://www.ti.com/lit/ml/mpds018l/mpds018l.pdf, Supply Voltage Max=5.5V, SVHC=NoSVHC(19-Dec-2012), Termination Type=SMD
U5: library part CMP-0859-00500-4, "IC CONFIG MULT-FUNC GATE SC70-6", Ambient Temperature Range High=+125°C, Ambient Temperature Range Low=-40°C, Manufacturer="Texas Instruments", Max Supply Voltage=5.5V, Min Supply Voltage=1.5V, Nominal Supply Current=10uA, Package=DCK0006A, Temperature="-40°C to +125°C", Automotive=No, Category=IC, ComponentLink2Description=Datasheet, ComponentLink2URL=http://www.ti.com/lit/ds/symlink/sn74lvc1g97.pdf, Device Class L1="Integrated Circuits (ICs)", Device Class L2="Logic ICs", Device Class L3="Logic Gates", Digikey Description="IC CONFIG MULT-FUNC GATE SC70-6", Height=1.1mm, Lead Free=Yes, Manufacturer Part Number=SN74LVC1G97DCKR, Mouser Description="Logic Gates CONFIGURABLE MULTI FUNCTN GATE", Number of Circuits=1, Number Of Inputs=3, Number Of Outputs=1, Octopart=https://octopart.com/sn74lvc1g97dckr-texas+instruments-464843, Propagation Delay=6.1ps, RoHS=TRUE, Standoff Height=0mm, Temperature Range High=+125°C, Temperature Range Low=-40°C
U6: library part CMP-06284-000093-1, "IC INTERFACE SPECIALIZED 36QFN", Capacitor Type=Ceramic, Case/Package=QFN, Manufacturer=Murata, Manufacturer Part Number=GRM188R71H104KA93D, Max Operating Temperature=70°C, Max Supply Voltage=3.6V, Min Operating Temperature=0°C, Min Supply Voltage=3V, Operating Supply Current=135mA, Operating Supply Voltage=3.3V, Package Quantity=490, Package Shape=Rectangular, Package Style=SMTMeter, Rated DC Voltage (URdc)=50V, Temperature Characteristics Code=X7R, Tolerance  (fill in as +-)=10%, Category="Ceramic Capacitors", ComponentLink1Description=https://datasheet.ciiva.com:443/pdfs/VipMasterIC/IC/MURE/MURE-S-A0004386736/MURE-S-A0004388063-1.pdf?src-supplier=IHS+Markit, ComponentLink1URL=https://datasheet.ciiva.com:443/pdfs/VipMasterIC/IC/MURE/MURE-S-A0004386736/MURE-S-A0004388063-1.pdf?src-supplier=IHS+Markit, ComponentLink2Description=https://datasheet.ciiva.com/11786/0900766b807a1cab-11786047.pdf?src-supplier=Rs, ComponentLink2URL=https://datasheet.ciiva.com/11786/0900766b807a1cab-11786047.pdf?src-supplier=Rs, ComponentLink3Description=https://datasheet.ciiva.com/19467/1857604-19467681.pdf?src-supplier=Jameco, ComponentLink3URL=https://datasheet.ciiva.com/19467/1857604-19467681.pdf?src-supplier=Jameco, ComponentLink4Description=https://datasheet.ciiva.com/29201/451744-da-01-en-vs-kondensator-0603-29201904.pdf?src-supplier=Conrad, ComponentLink4URL=https://datasheet.ciiva.com/29201/451744-da-01-en-vs-kondensator-0603-29201904.pdf?src-supplier=Conrad, ComponentLink5Description=https://datasheet.ciiva.com/131/partnumbering-e-01-131738.pdf?src-supplier=Digikey, ComponentLink5URL=https://datasheet.ciiva.com/131/partnumbering-e-01-131738.pdf?src-supplier=Digikey, ComponentLink6Description=https://datasheet.ciiva.com/131/partnumbering-e-01-131739.pdf?src-supplier=Digikey, ComponentLink6URL=https://datasheet.ciiva.com/131/partnumbering-e-01-131739.pdf?src-supplier=Digikey, ComponentLink7Description=https://datasheet.ciiva.com/131/partnumbering-e-01-131740.pdf?src-supplier=Digikey, ComponentLink7URL=https://datasheet.ciiva.com/131/partnumbering-e-01-131740.pdf?src-supplier=Digikey, ComponentLink8Description=https://datasheet.ciiva.com/14116/nmgrm-data-en-14116602.pdf?src-supplier=Distrelec, ComponentLink8URL=https://datasheet.ciiva.com/14116/nmgrm-data-en-14116602.pdf?src-supplier=Distrelec, ComponentLink9Description=https://datasheet.ciiva.com/48436/nmgrm-data-en-48436667.pdf?src-supplier=Distrelec, ComponentLink9URL=https://datasheet.ciiva.com/48436/nmgrm-data-en-48436667.pdf?src-supplier=Distrelec, ComponentLink10Description=https://datasheet.ciiva.com/28534/4360-28534245.pdf?src-supplier=Element14, ComponentLink10URL=https://datasheet.ciiva.com/28534/4360-28534245.pdf?src-supplier=Element14, ComponentLink11Description=https://datasheet.ciiva.com/7937/1747470-7937658.pdf?src-supplier=Element14, ComponentLink11URL=https://datasheet.ciiva.com/7937/1747470-7937658.pdf?src-supplier=Element14, ComponentLink12Description=https://datasheet.ciiva.com/7937/4360-7937659.pdf?src-supplier=Element14, ComponentLink12URL=https://datasheet.ciiva.com/7937/4360-7937659.pdf?src-supplier=Element14, ComponentLink13Description=https://datasheet.ciiva.com:443/pdfs/VipMasterIC/IC/KEME/KEME-S-A0008991665/KEME-S-A0008991665-1.pdf?src-supplier=IHS+Markit, ComponentLink13URL=https://datasheet.ciiva.com:443/pdfs/VipMasterIC/IC/KEME/KEME-S-A0008991665/KEME-S-A0008991665-1.pdf?src-supplier=IHS+Markit, Data Rate=35Mbps, Dielectric Material=Ceramic, Height=0.95mm, Interface=SPI, JESD-609 Code=e3, Lead Free="Lead Free", Length=6.15mm, Mount="Surface Mount", Mounting Technology="Surface Mount", Multilayer=Yes, Number of Pins=36, Number of Transceivers=1, Packaging=Tray, Pins=2, Pricing="8000=0.0106, 12000=0.0105, 20000=0.0104, 24000=0.0103, 100000=0.0096 (USD)", Reach SVHC Compliant=Yes, RoHS=Yes, RoHS Compliant=Yes, Series=-, Stock=200000, Supplier="Arrow Electronics", Supplier Part Number=GRM188R71H104KA93D, Terminal Finish=Nickel, Termination=Wraparound, Tolerance (fill in as +-)=10%, Width=6.15mm
Y1: library part CMP-03913-116876455-1, "830035266 WE-XTAL Quartz Crystal", Frequency=24MHz, Max Operating Temperature=60°C, Min Operating Temperature=-10°C, Height=800µm, Length=3.2mm, NexarPartId=116876455, Width=2.5mm

## Via types
v1: diameter 0.45, hole 0.3, Top Layer to Bottom Layer, 73 vias
v2: diameter 0.5, hole 0.3, Top Layer to Bottom Layer, 25 vias

## Nets (pads, with @x,y where several pads share a name; then routed paths per layer and width w, separated by ;. In a path a pad name is that pad's centre, name@x,y a point inside that pad or via, vN(x,y) a via of type N, cw(c..) or ccw(c..) an arc to the next point about the centre after c; other vN are vias at no path point)
3V3: C2.1 C3.1 C14.1 C18.1 C19.1 C20.1 FB2.1 Q1.tga Q2.3 R4.1 TP2.1 U1.5 U3.2 U6.6 U6.14 U6.18 U6.22 | length 26.5
  Top Layer w0.254: R4.1 v1(-12.5,1) ; U1.5 -12.853,2.8 -12.553,2.5 v1(-12.5,2.5) ; v1(-12.5,4) -12,4.5 C2.1 ; C3.1 -10.827,2.573 -10.827,2.623 -9.988,3.462 -9.038,3.462 v1(-9,3.5) ; v1(-5,-1.5) -4.962,-1.538 -4.962,-2.088 -4.45,-2.6 -4.45,-3.55 -3.5,-4.5 U3.2 ; Q1.tga 9.508,-7.008 10.492,-7.008 v1(10.5,-7)
  Bottom Layer w0.254: v1(-0.3,-3.3) -0.3,-3.25 0.4,-2.55 C19.1 0.4,-2.527 0.473,-2.6 U6.22 ; U6.18 2.5,-5.6 2.6,-5.7 2.6,-6.5 ; C20.1 2.6,-6.5 ; U6.14 4.5,-5.7 4.3,-5.9 3.2,-5.9 2.6,-6.5 ; C14.1 11.95,6.8 13.648,6.8 FB2.1@14,7.152 ; FB2.1 FB2.1@14,7.152 ; TP2.1 16.5,4.629 15.538,5.591 15.538,5.962 v1(15.5,6) 14.85,6.65 14.526,6.65 14.522,6.654 14.448,6.654 14,7.102 FB2.1@14,7.152
3V3_EN: TP3.1 U1.3
4.5V: C8.1 C9.1 R7.1 R10.2 R11.2 TP4.1 U2.4 U2.8 U4.5 U5.1 U5.5 | length 35.6
  Top Layer w0.254: R11.2 R11.2@-9.823,-7.923 ; C9.1 -8.5,-6.6 R11.2@-9.823,-7.923 ; C8.1 -7.05,-4.2 U4.5 -9.55,-5.85 R10.2 -9.823,-6.123 R11.2@-9.823,-7.923 ; U2.8 -4.99,0.095 -3,2.085 -3,2.915 -2.01,3.905 U2.4 ; v1(-1.3,6.9) -1.353,6.9 -1.727,6.526 -2.298,6.526 R7.1 -2.423,6.323 -1.086,4.986 U2.4 ; U5.5 4.527,3.573 3.927,3.573 3.35,4.15 U5.1 0.182,4.15 -0.063,3.905 U2.4
  Bottom Layer w0.254: v1(-1.3,6.9) -1.262,6.938 -0.863,6.938 -0.8,7 TP4.1
4.5V_EN: C11.1 Q3.2 R1.1 TP7.1 U4.3 | length 44.3
  Top Layer w0.254: v1(-20.4,-8.8) -20.4,-8.853 -20.031,-9.222 -20.031,-9.42 -19.851,-9.6 -2.05,-9.6 0.5,-7.05 R1.1 ; v1(-18,-6.5) -18,-4.5 -17,-3.5 -13.15,-3.5 -11.823,-2.173 -11.623,-2.173 -11.45,-2 U4.3 ; C11.1 2.53,6.63 2.951,6.63 3.1,6.778 3.1,8.2 3.4,8.5 5.5,8.5 7,7 7.965,7 8.715,6.251 8.797,6.251 8.95,6.098 Q3.2
  Bottom Layer w0.254: TP7.1 -18.978,-8.5 -18.038,-7.559 -18.038,-6.538 v1(-18,-6.5)
AVCC: C15.1 C16.1 FB2.2 TP8.1 U6.36 | length 20.9
  Bottom Layer w0.254: C16.1 12.173,1.273 12.173,1.373 C15.1@14.25,3.45 ; TP8.1 13.5,-4.9 14.3,-4.1 14.3,-3.2 17,-0.5 17,0.4 16.2,1.2 15,1.2 14.25,1.95 C15.1@14.25,3.45 ; FB2.2 14,3.75 C15.1 C15.1@14.25,3.45
CC: J2.A5 R8.1 | length 5.1
  Top Layer w0.254: R8.1 14.8,-3.4 16.95,-1.25 J2.A5
CD: R14.1 U6.26 | length 9.6
  Bottom Layer w0.22: 0.9,-0.6 U6.26
  Bottom Layer w0.254: R14.1 0,5.5 0.75,4.75 1.5,4.75 2,4.25 2,1.5 0.75,0.25 0.75,-0.45 0.9,-0.6
CLK: SD1.5 U6.9 | length 25.3
  Bottom Layer w0.254: SD1.5 -9.305,-1.695 -7.1,-3.9 -4,-3.9 -1.4,-6.5 0.7,-6.5 2.3,-8.1 7.3,-8.1 7.7,-7.7 7.7,-5.942 7.312,-5.555 U6.9
CMD: SD1.3 U6.11 | length 20.7
  Layer 1 w0.254: v1(1.8,-5.9) v1(6,-5.9)
  Bottom Layer w0.254: SD1.3 -5.905,0.505 0.5,-5.9 v1(1.8,-5.9) ; v1(6,-5.9) 6,-5.4 5.995,-5.405 5.995,-4.917 U6.11
D_IN_N: D3.4 J1.3 J2.A7 | length 9.2
  Top Layer w0.155: v1(16.2,0) 17,0 17.2,-0.2 18.62,-0.2 J2.A7
  Bottom Layer w0.155: D3.4 10.8,0.2 11.3,0.7 15.5,0.7 v1(16.2,0)
D_IN_P: D3.6 J1.2 J2.A6 | length 7
  Top Layer w0.155: v1(15.5,-0.8) 15.525,-0.775 18.645,-0.775 J2.A6
  Bottom Layer w0.155: D3.6 15.158,-0.495 15.463,-0.8 v1(15.5,-0.8)
D_N: D3.3 U6.3 | length 3.9
  Bottom Layer w0.155: U6.3 8.6,-1.1 9.605,-2.105 D3.3
D_P: D3.1 U6.2 | length 5.5
  Bottom Layer w0.155: U6.2 8.9,-0.6 9.501,-1.201 9.55,-1.25 11.65,-1.25 11.8,-1.4 D3.1
DAT0: SD1.7 U6.5 | length 29.4
  Layer 1 w0.254: v1(7.9,-8.3) 7.9,-3.6 v1(8.5,-3)
  Bottom Layer w0.254: SD1.7 -8.08,-3.895 -6.9,-5.075 -3.95,-5.075 -1.8,-7.225 0.55,-7.225 2.125,-8.8 6.3,-8.8 6.825,-9.325 7.55,-9.325 7.8,-9.075 7.8,-8.8 7.862,-8.738 7.862,-8.338 v1(7.9,-8.3) ; U6.5 7.317,-2.105 8.005,-2.105 8.5,-2.6 v1(8.5,-3)
DAT1: SD1.8 U6.4 | length 30.6
  Layer 1 w0.254: v1(-8.325,-5.25) -6.1,-5.25 -2.05,-9.3 8.425,-9.3 9.1,-8.625 9.1,-2.3 8.55,-1.75 v1(8.5,-1.75)
  Bottom Layer w0.22: U6.4@7.57,-1.6 8.051,-1.6 ; 7.81,-1.6 7.813,-1.597 8.294,-1.597 v1@8.447,-1.75
  Bottom Layer w0.254: SD1.8 -8.633,-4.995 -8.378,-5.25 v1(-8.325,-5.25) ; v1@8.447,-1.75 v1(8.5,-1.75)
DAT2: SD1.1 U6.25 | length 14.3
  Bottom Layer w0.254: SD1.1 -4.424,2.705 -0.611,-1.108 1.679,-1.108 U6.25
DAT3: SD1.2 U6.23 | length 13.8
  Bottom Layer w0.254: SD1.2 -9.805,1.605 -9.4,1.2 -4.9,1.2 -2.1,-1.6 -0.9,-1.6 -0.75,-1.75 0.85,-1.75 1.192,-2.092
FLTOUT: Q2.1 U2.3 U5.3 | length 15.7
  Top Layer w0.254: v1(-1.086,2.635) 1.935,2.635 2.15,2.85 U5.3 ; v1(-0.2,4.8) 5.2,4.8 5.6,5.2 7.6,5.2 8.331,4.469 Q2.1
  Bottom Layer w0.254: v1(-1.086,2.635) -1.086,3.914 v1(-0.2,4.8)
GND: C1.1 C2.2 C3.2 C4.2 C5.2 C6.2 C7.2 C8.2 C9.2 C10.2 C11.2 C12.2 C13.1 C14.2 C15.2 C16.2 C17.1 C18.2 C19.2 C20.2 C21.2 C22.2 D1.1 D2.1 D3.2 J1.4 J2.A1 J2.A12 R2.1 R5.1 R6.1 R8.2 R9.2 R11.1 R12.2 R13.2 R14.2 R16.1 SD1.4 U1.2 U2.1 U4.2 U5.2 U6.28 U6.37 Y1.2 Y1.4 | length 48.7
  Top Layer w0.254: J1.4 v1(-21.5,-5) ; v1(-16,-8) -16,-7.947 -15.651,-7.598 -15.651,-7.026 -15.051,-6.426 C12.2 ; v1(-14.5,4) U1.2 ; v1(-14.3,-2.8) -14.262,-2.762 -14.262,-2.516 -13.823,-2.077 R5.1 ; v1(-12.224,-0.118) -12.187,-0.08 -11.78,-0.08 -11.25,0.45 C10.2 ; v1(-12,-7.5) -11.962,-7.538 -11.639,-7.538 -11.456,-7.721 -11.379,-7.721 -11.177,-7.923 R11.1 ; U4.2 -10.327,-1.973 -10.327,-2.673 -10,-3 v1(-9,-3) ; C3.2 -9.5,2.5 v1(-9,2) ; C2.2 v1(-9,4.5) ; C4.2 -9.75,7.25 v1(-9.5,7.5) ; v1(-8,-2) -7.962,-2.038 -7.762,-2.038 -7.05,-2.75 C8.2 ; v1(-7.5,-8) -7.462,-7.962 -7.462,-7.812 -7.05,-7.4 C9.2 ; C7.2 -4.438,7.462 -4.038,7.462 v1(-4,7.5) ; v1(-3,0.5) -2.595,0.095 U2.1 ; R9.2 -2,-7.5 v1(-1.5,-8) ; C6.2 0.325,6.1 0.887,5.538 0.962,5.538 v1(1,5.5) ; v1(2,7.677) 2.038,7.639 2.211,7.639 2.45,7.4 C11.2 ; v1(4.2,-6.9) 4.2,-6.025 R2.1 ; v1@4.962,5.538 v1(5,5.5) 5,5.553 5.1,5.653 R12.2 ; C1.1 6.35,-8.675 v1(7.225,-8.675) ; 10.55,1 10.55,1.1 ; R8.2 15.6,-6.6 15.962,-6.962 15.962,-7.462 v1(16,-7.5) ; v1(18.5,-4) 18.5,-3.947 18.67,-3.777 J2.A1 ; v1(18.5,3) 18.5,2.947 18.67,2.777 J2.A12
  Bottom Layer w0.254: v1(-12.224,-0.118) -12.171,-0.118 -11.967,-0.322 -11.323,-0.322 SD1.4 ; v1(-1.1,-2.2) -1.047,-2.2 -0.87,-2.377 -0.473,-2.377 -0.4,-2.45 C19.2 ; v1(0.4,3.2) 0.438,3.162 0.934,3.162 C22.2 ; v1(2.9,2.1) 2.9,2.252 3.348,2.7 Y1.2 ; C20.2 4.047,-7 4.147,-6.9 v1(4.2,-6.9) ; Y1.4 5.916,3.984 6.516,3.984 v1(6.9,3.6) ; C13.1 v1(6.8,-7) ; C21.2 8,3.925 9.238,5.162 9.562,5.162 v1(9.6,5.2) 9.653,5.2 9.752,5.101 R16.1 ; 9.5,2.5 11.1,2.5 v1(11.6,2) 11.547,2 11.37,1.823 11.023,1.823 10.75,1.55 C17.1 ; v1(9.6,6.9) 10.15,6.9 C14.2 ; C18.2 11.65,-4.5 12.1,-4.95 C5.2 12.1,-5.05 11.65,-5.5 v1(11.6,-5.5) ; v1(10.9,-3.5) 10.9,-3.2 11.277,-2.823 11.277,-2.128 D3.2 ; C15.2@12.75,3.45 C15.2 ; C16.2 13.361,1.2 13.561,1.4 v1(13.6,1.4) ; R6.1 13.15,-2.703 13.4,-2.453 v1(13.4,-2.4)
  other v2: 2.7,-3.9 3.6,-3.9 4.5,-3.9 5.4,-3.9 6.3,-3.9 2.7,-3 3.6,-3 4.5,-3 5.4,-3 6.3,-3 2.7,-2.1 3.6,-2.1 4.5,-2.1 5.4,-2.1 6.3,-2.1 2.7,-1.2 3.6,-1.2 4.5,-1.2 5.4,-1.2 6.3,-1.2 2.7,-0.3 3.6,-0.3 4.5,-0.3 5.4,-0.3 6.3,-0.3
NetC1_2: C1.2 Q1.1 R1.2 R2.2 | length 9.5
  Top Layer w0.254: R2.2 2.775,-8.45 C1.2 2.825,-8.725 3.423,-9.323 3.648,-9.323 4.325,-10 7.617,-10 8.55,-9.067 Q1.1
NetC6_1: C6.1 R7.2 U2.6 U2.7 | length 11.4
  Top Layer w0.254: U2.7 U2.6 -5.847,2.702 -4.298,2.702 -4,3 -4,5 -3.5,5.5 -3.5,7 -3.32,7.18 -3.074,7.18 -2.577,7.677 R7.2 -0.548,7.677 -0.325,7.9 C6.1
NetC7_1: C7.1 TP6.1 U2.5 | length 6.9
  Top Layer w0.254: TP6.1 -6,7 -5.5,6.5 -5.158,6.5 -5.131,6.527 -4.573,6.527 C7.1 -4.5,5.511 -5.117,4.894 -5.117,4.075 -5.287,3.905 U2.5
NetC13_2: C13.2 C17.2 TP9.1 U6.13 U6.34 | length 9.1
  Top Layer w0.254: v1(11.5,4) TP9.1
  Bottom Layer w0.254: U6.13 5,-6.75 C13.2 ; C17.2 9.25,1.55 8.605,2.195 8.605,2.605 9,3 9.395,3.395 9.605,3.395 10,3 11,3 11.206,3.206 11.206,3.706 v1(11.5,4)
NetC21_1: C21.1 R15.1 U6.33 Y1.1 | length 12.6
  Layer 1 w0.254: v1(3.8,7.8) 4.725,6.875 5.425,6.875 5.9,6.4 5.9,3.7 6.5,3.1 v1(6.5,2.1)
  Bottom Layer w0.254: U6.33 5,1.2 5.6,1.8 Y1.1 5.725,2.7 6.287,2.138 6.462,2.138 v1(6.5,2.1) ; 6.721,2.2 6.975,2.2 7.124,2.349 7.124,2.947 7.272,3.095 C21.1
NetC22_1: C22.1 R15.2 U6.32 Y1.3 | length 22.2
  Layer 1 w0.254: v1(-2.5,4.7) -0.8,6.4 1.4,6.4 2.194,5.606 2.794,5.606 v1(2.8,5.6)
  Bottom Layer w0.254: v1(-2.5,4.7) -2.5,2.3 -2.2,2 -0.7,2 -0.3,2.4 -0.3,3.6 0.004,3.904 C22.1 ; v1(2.8,5.6) 2.827,5.573 2.827,4.748 3.275,4.3 Y1.3 ; R15.2 4,4.775 3.525,4.3 Y1.3 ; U6.32 4.5,3.7 4.348,3.852 3.848,3.852 Y1.3
NetD1_2: D1.2 Q1.2 | length 6.5
  Top Layer w0.5: D1.2 8.5,-5.6 8.5,-7.851 8.649,-8 10,-8 10.42,-8.42 10.42,-8.955 Q1.2
NetD2_2: D2.2 R3.2 | length 6.1
  Top Layer w0.254: D2.2@9.2,1.747 9.2,0.15 10.15,-0.8 11.825,-0.8 12.675,0.05 R3.2
NetQ2_2: Q2.2 R3.1 | length 6.8
  Top Layer w0.254: Q2.2 7.05,4.387 7.202,4.234 7.285,4.234 8.019,3.5 10.5,3.5 11.3,2.7 12.75,2.7 R3.1
NetQ3_1: Q3.1 R12.1 U5.4 | length 0.9
  Top Layer w0.254: 4.5,7.677 4.577,7.677 ; 6.238,6.016 Q3.1
NetR4_2: R4.2 R5.2 U1.4 | length 4.9
  Top Layer w0.254: U1.4 -15.45,1.1 R4.2 -15.177,0.827 R5.2
NetR10_1: R10.1 U4.4 | length 1.9
  Top Layer w0.254: U4.4 -11.45,-5.85 R10.1
NetR13_1: R13.1 U6.30
NetR16_2: R16.2 U6.35
NetU6_7: U6.7
NetU6_8: U6.8
NetU6_10: U6.10
NetU6_20: U6.20
SHD: C5.1 J1.5 J1.6 J2.S1 J2.S2 R6.2 SD1.9 SD1.10 SD1.11 SD1.12 | length 101.7
  Top Layer w0.254: J1.5 J1.6 -21,-6.5 -18.5,-9 v1(-14.5,-9) ; J2.S1 21.513,-4.77 22.021,-4.262 22.021,-4.019 22.5,-3.54 22.5,2.54 22.021,3.019 22.021,3.262 21.513,3.77 J2.S2
  Bottom Layer w0.254: J1.5 -23.725,5.5 -20.225,9 15,9 20.038,3.962 21.078,3.962 J2.S2 ; v1(-14.5,-9) -14.462,-8.962 -14.261,-8.962 -13.65,-8.351 SD1.9 -13.052,-6.777 -12.027,-6.777 -12,-6.75 -11.25,-6.75 -10.625,-7.375 SD1.10 ; SD1.12 SD1.11
SHORT: R9.1 TP5.1 U2.2 U3.4 U5.6 | length 17.3
  Top Layer w0.254: R9.1 -4.177,-7.423 -3.253,-6.5 -2,-6.5 -1.5,-6 -1.5,-3.9 -2.55,-2.85 U3.4 ; U2.2 4.865,1.365 6,2.5 6,3.5 5.35,4.15 U5.6
VCC: C4.1 C10.1 D3.5 FB1.1 Q3.3 TP1.1 U1.1 U4.1 | length 69.7
  Top Layer w0.254: v1(-16.5,-0.5) -17.5,0.5 -17.5,4 -16.5,5 -16.5,6 -16,6.5 -14.5,6.5 -14,7 -14,7.324 FB1.1 ; v1(-14,-1) -11.2,-1 C10.1@-9.75,0.45 ; U1.1 -13.55,7.226 FB1.1 ; C4.1 C4.1@-11.25,6.55 ; v1(-10.5,7.5) -10.538,7.462 -10.538,7.263 C4.1@-11.25,6.55 ; C10.1 C10.1@-9.75,0.45 ; U4.1 -9.55,-1.6 -9.75,-1.4 C10.1@-9.75,0.45 ; Q3.3 8,7.903 8.152,7.75 TP1.1 12.75,7.5 13.421,7.5 14.112,6.809 14.112,6.588 14.9,5.8 14.9,0.347 14.7,0.147 v1(14.7,0.1) ; FB1.1 -12.2,7.5 C4.1@-11.25,6.55
  Layer 1 w0.254: v1(-10.5,7.5) -9.5,8.5 8.5,8.5 9.5,7.5 v1(13,7.5)
  Bottom Layer w0.254: v1(-16.5,-0.5) -14.5,-0.5 v1(-14,-1) ; D3.5 11.323,-0.472 11.323,0.123 11.496,0.296 12.973,0.296 13.169,0.1 v1(14.7,0.1)
VCC_SD: C12.1 SD1.6 U6.21 | length 22.1
  Top Layer w0.254: C12.1 -13.327,-4.574 -13.153,-4.4 v1(-13.1,-4.4)
  Layer 1 w0.254: v1(-12.7,-1.9) -9.1,-1.9 -7.8,-3.2 v1(-1.3,-3.2)
  Bottom Layer w0.22: v1(-1.3,-3.2) -0.4,-4.1 0.1,-4.1 0.853,-3.347 1.028,-3.347 1.245,-3.13 1.331,-3.13 1.35,-3.111 1.449,-3.111 U6.21@1.462,-3.125
  Bottom Layer w0.254: v1(-13.1,-4.4) -13.1,-2.353 -12.7,-1.953 v1(-12.7,-1.9) -12.078,-2.522 -11.323,-2.522 SD1.6
VIN: FB1.2 J1.1 J2.A4 J2.A9 | length 58.2
  Top Layer w0.254: FB1.2 -15.102,7.5 -14.75,7.852 -14.75,7.998 -14.3,8.448 v1(-12.5,8.448) ; J2.A4 18.693,-1.727 21.273,-1.727 21.5,-1.5 21.5,0.5 ; J2.A9 18.693,0.727 21.273,0.727 21.5,0.5 ; v1(20.5,2) 21.5,1 21.5,0.5
  Top Layer w0.5: J1.1 -18,7.5 FB1.2
  Bottom Layer w0.254: v1(-12.5,8.448) 14.634,8.448 14.678,8.492 18.928,4.242 18.928,3.572 v1(20.5,2)
pads on no net: J2.A2 J2.A3 J2.A8 J2.A10 J2.A11 U3.1 U3.3 U3.5 U6.1 U6.12 U6.15 U6.16 U6.17 U6.19 U6.24 U6.27 U6.29 U6.31
copper on no net: | length 1.5
  Top Layer w0.254: v1(-3,-4) -2.55,-4.45 -2.55,-5.275

## Polygon pours and split planes (outlines as drawn)
GND on Layer 2 "GND_L03_P000" (solid, pour order 0): -24,9.5 ccw(c-24,5.5) -28,5.5 -28,-6.5 ccw(c-24,-6.5) -24,-10.5 17,-10.5 cw(c21,-10.5) 21,-6.5 ccw(c21,-4) 23.5,-4 23.5,3 ccw(c21,3) 21,5.5 cw(c21,9.5) 17,9.5
3V3 on Layer 1 "3V3_L02_P001" (solid, pour order 1): -23.953,9.479 ccw(c-23.953,5.479) -27.953,5.479 -27.953,-6.521 ccw(c-23.953,-6.521) -23.953,-10.521 17.047,-10.521 cw(c21.047,-10.521) 21.047,-6.521 ccw(c21.047,-4.021) 23.547,-4.021 23.547,2.979 ccw(c21.047,2.979) 21.047,5.479 cw(c21.047,9.479) 17.047,9.479

## Silkscreen, mask and mechanical layers (free items; w line width, h text height)
Mechanical 13:
  the board outline again, w0.254